# Altium PCB morse_code_watch.PcbDoc
Units mm, origin at the board's own origin, x right, y up, seen from the top; angles counter-clockwise.
Board outline 43.8 x 43.8 mm, 2 copper layers (Top Layer, Bottom Layer), stack 1.671 mm thick; 14 components, 12 nets, 58 pads, 3 vias.
Unrouted connection lines stored in the file: 1.
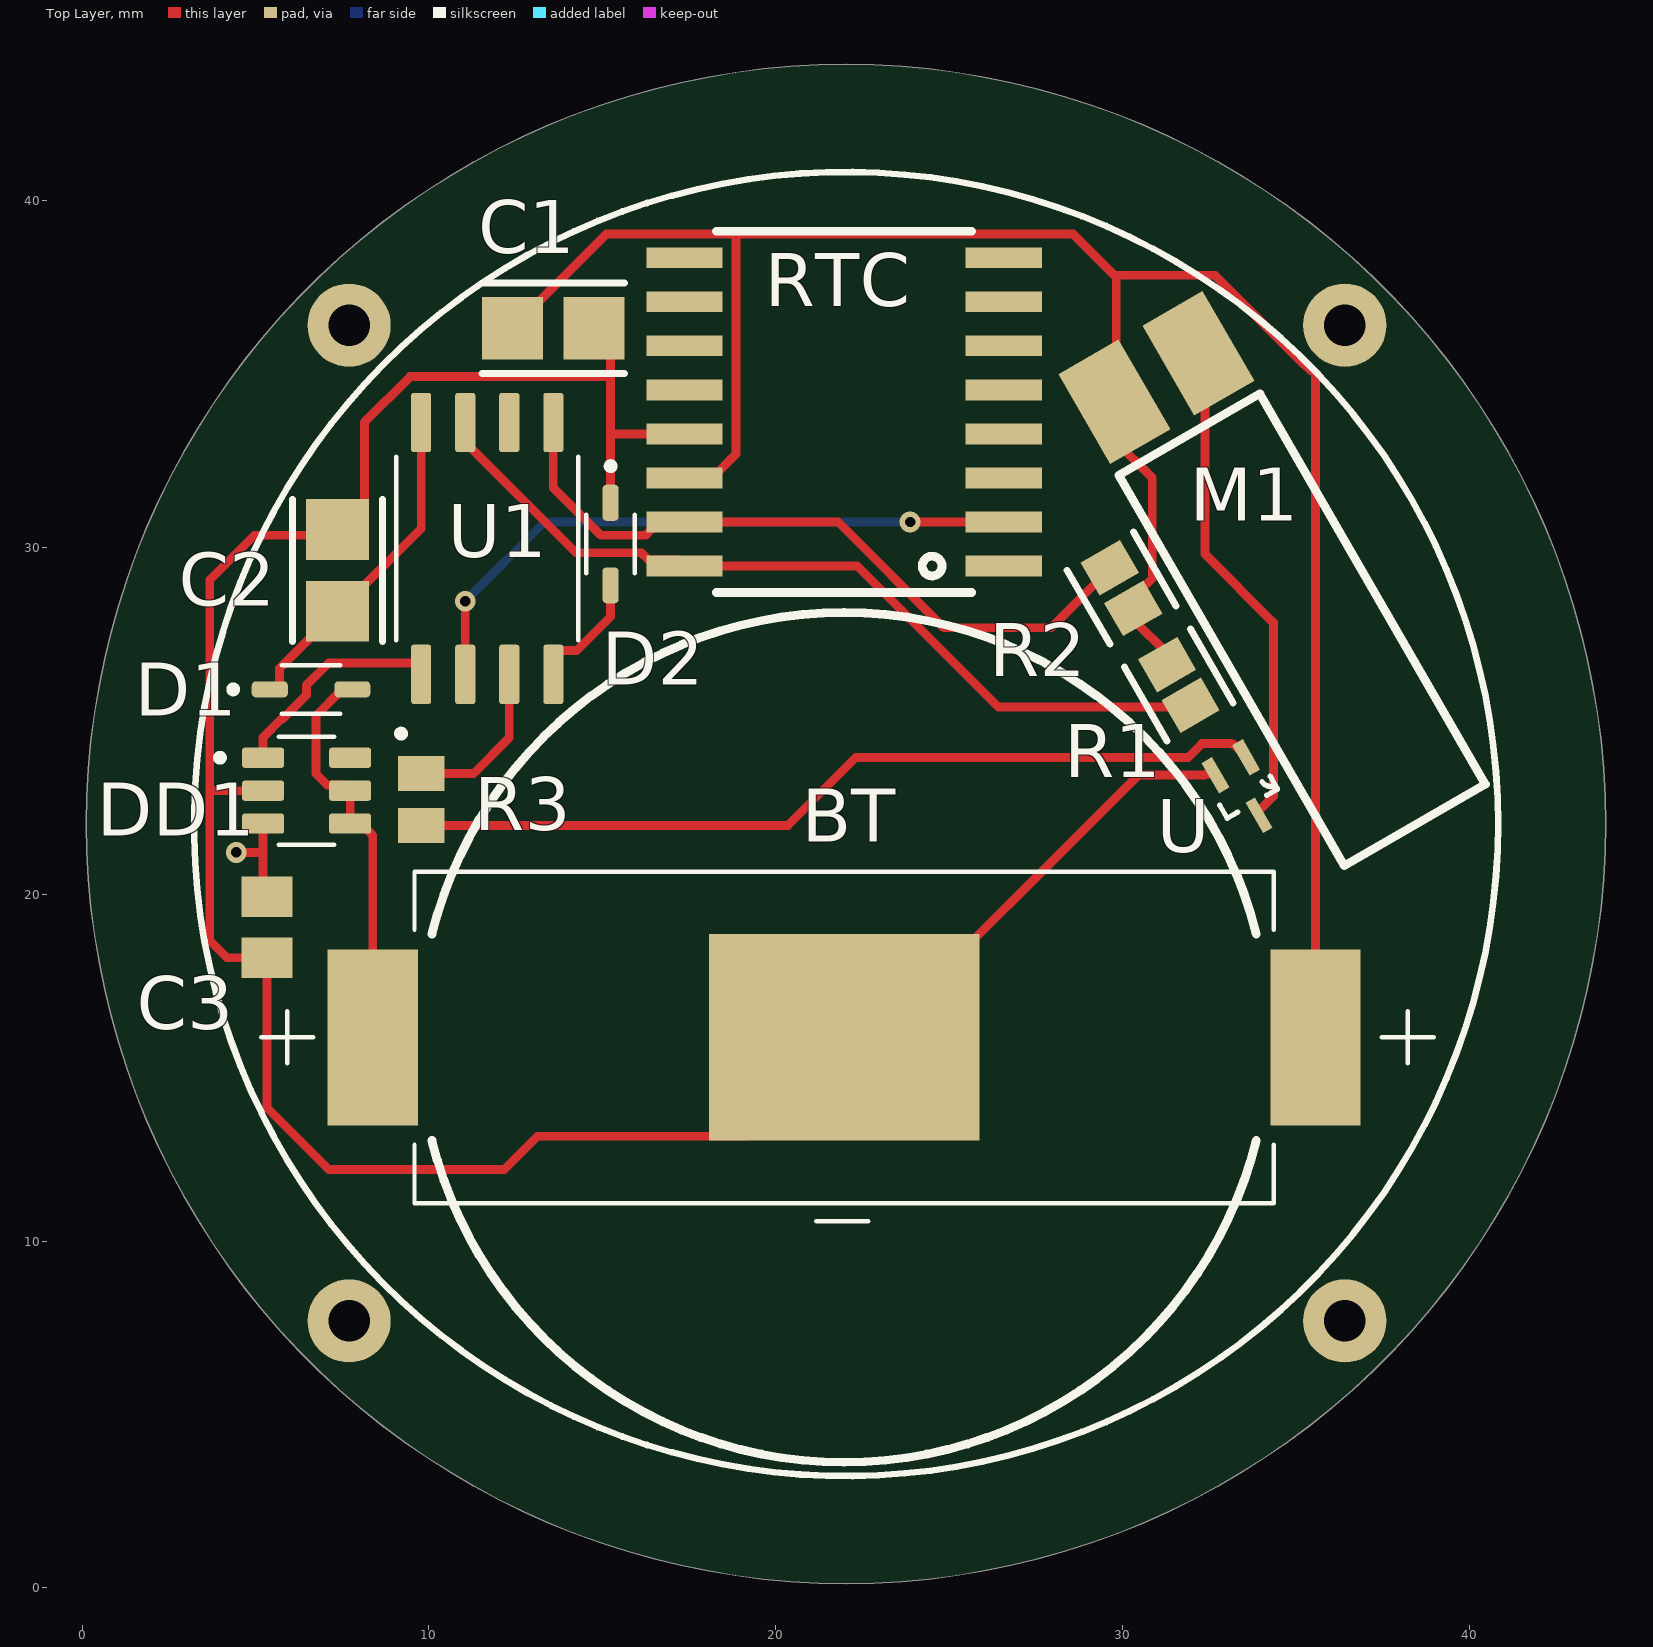
[diagram p0: Top Layer view]
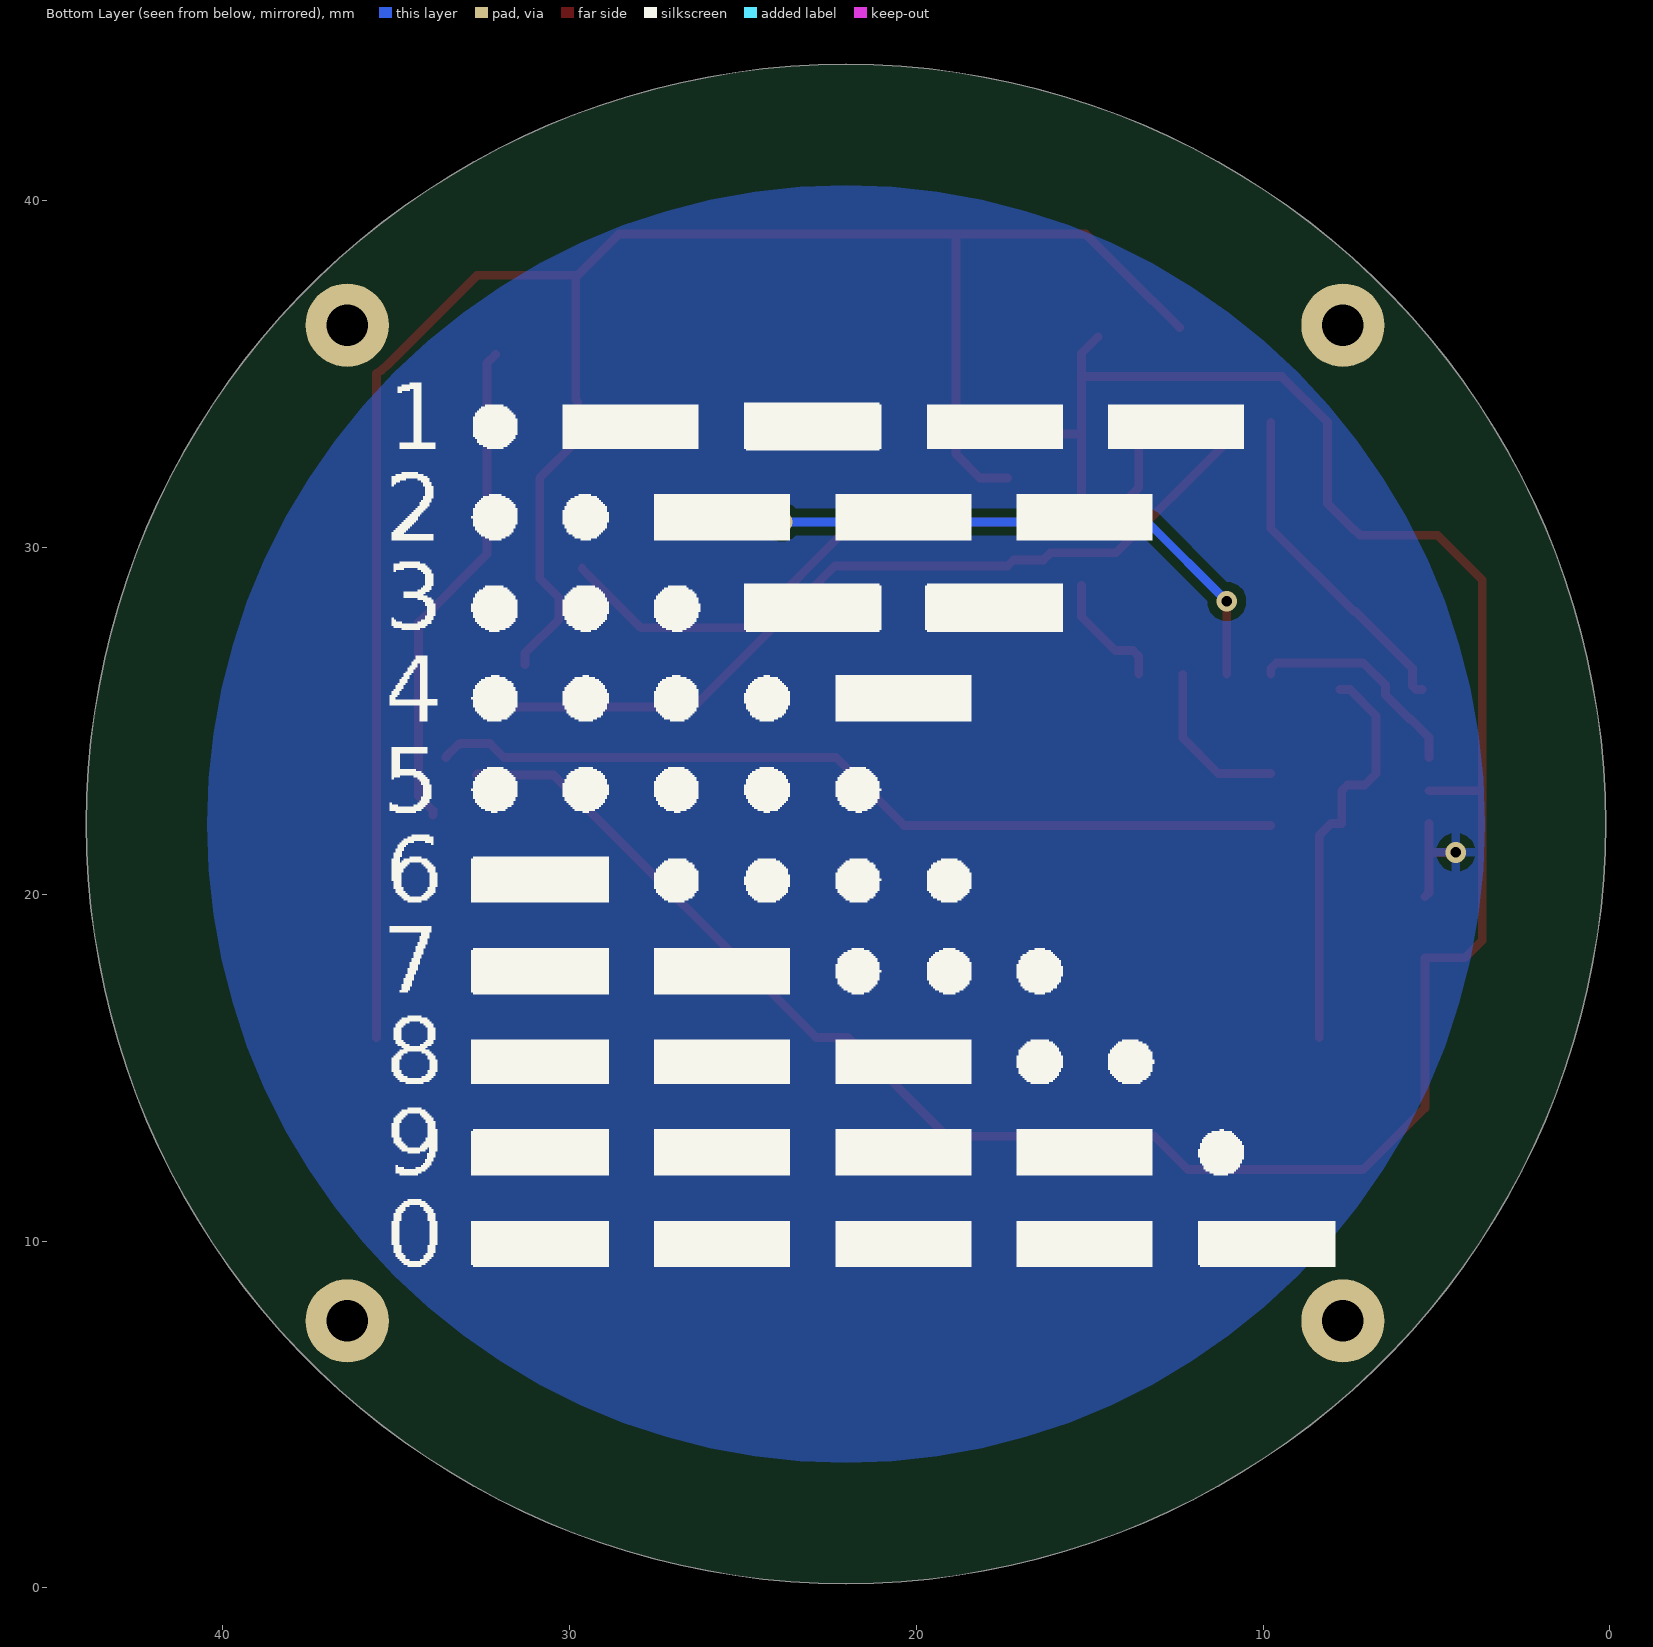
[diagram p1: Bottom Layer view, seen from below]
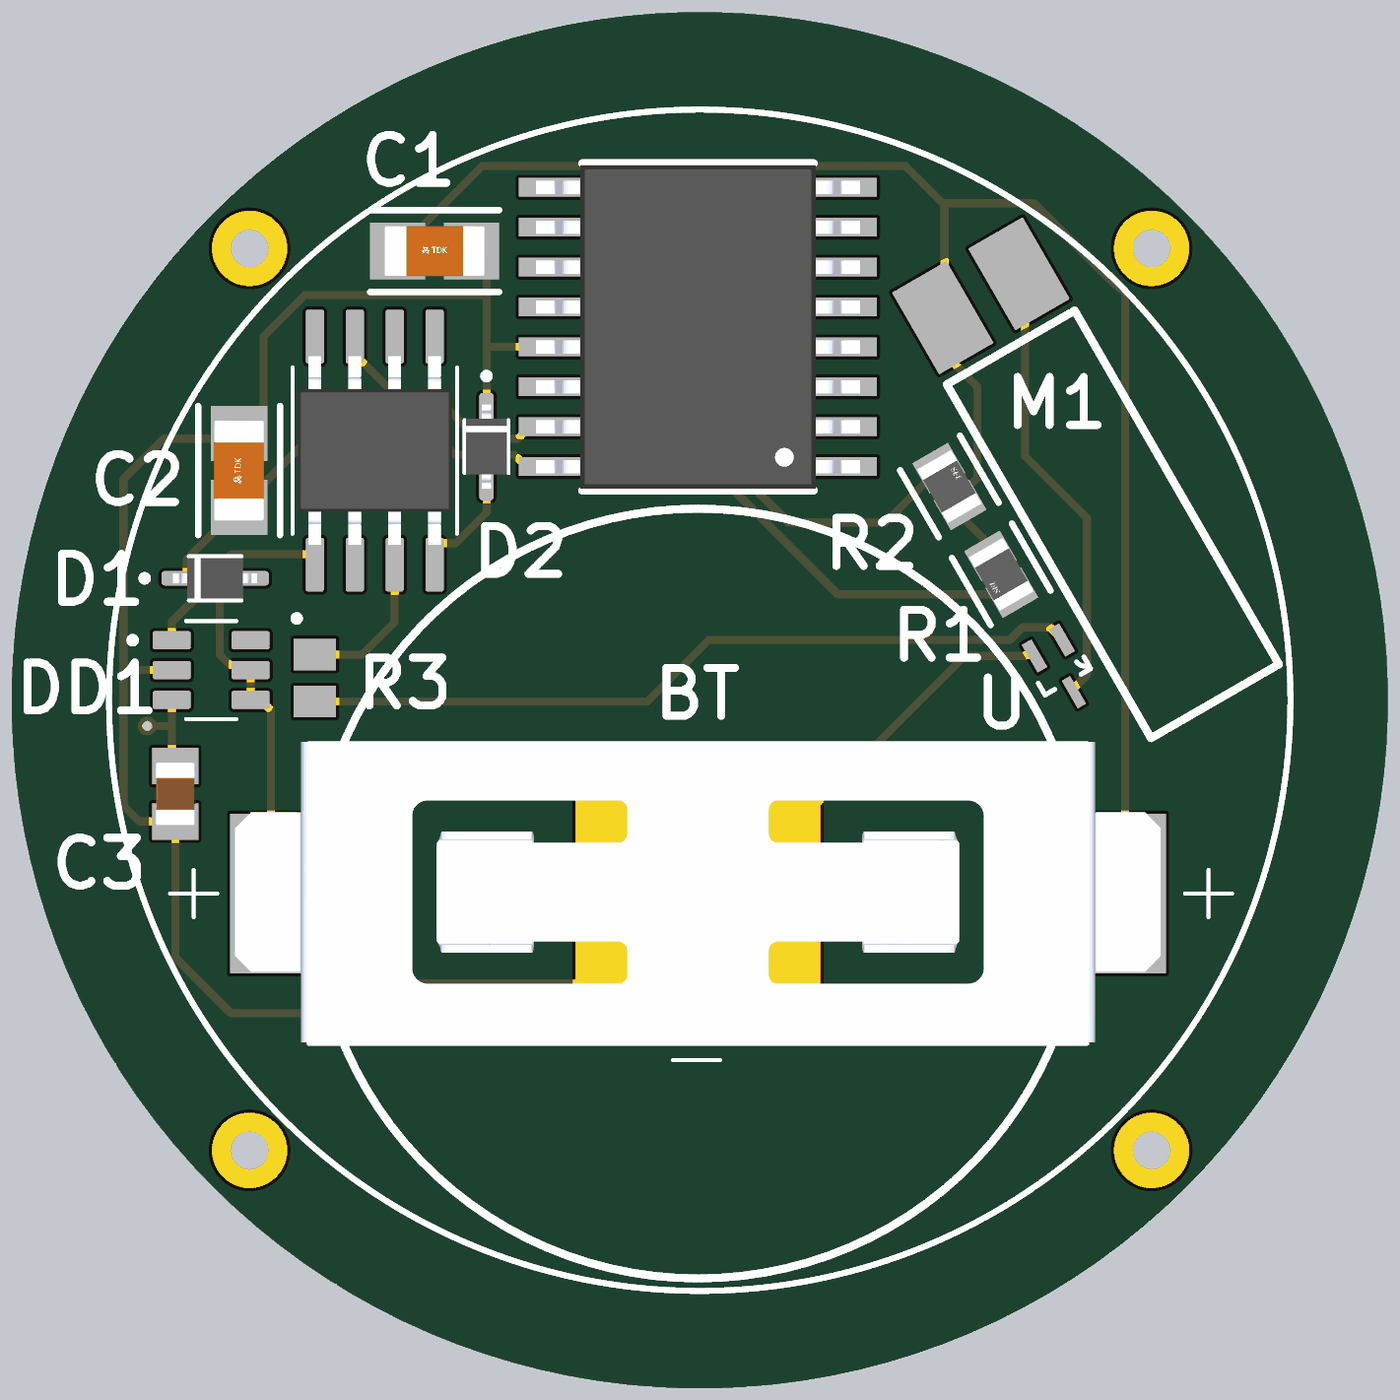
[diagram p2: 3D render of the assembled board from above, using the file's embedded part models]

## Layer stack, top to bottom
Top Solder: solder mask 0.0102, Solder Resist, Dk 3.5
Top Layer: signal copper 0.0356
Dielectric 1: dielectric 1.6, FR-4, Dk 4.8
Bottom Layer: signal copper 0.0356
Bottom Solder: solder mask 0.0102, Solder Resist, Dk 3.5

## Board outline
22.027,0.127 cw(c22.027,22.027) 0.127,22.027 cw(c22.027,22.027) 22.027,43.927 cw(c22.027,22.027) 43.927,22.027 cw(c22.027,22.027)

## Design rules (kind name [scope] priority, off if disabled: settings)
Clearance [All] p1: gap=0.15 ignorepadtopadclearanceinfootprint=FALSE
MinimumSolderMaskSliver [All] p1: minsoldermaskwidth=0.15
PolygonConnect [All] p1: connectstyle=Relief reliefconductorwidth=0.254 reliefentries=4 polygonreliefangle="90 Angle" airgapwidth=0.254
RoutingVias [All] p1: holewidth=0.3 width=0.6 viastyle="Through Hole" minholewidth=0.3 minwidth=0.6 maxholewidth=0.711 maxwidth=1.27
SilkToSolderMaskClearance [IsPad] p1: minsilkscreentomaskgap=0.15 clearancetoexposedcopper=TRUE
SolderMaskExpansion [All] p1: expansion=0.102 istentingtop=FALSE
Width [All] p1: maxlimit=0.254 minlimit=0.254 preferedwidth=0.254
28 further rules are at their usual default settings.

## Components (designator, comment, footprint, x,y, rotation, side; value= is the part's Value field where it differs from the comment)
BT "BC-2005" BAT_BC-2005 21.971,15.875 r180 top
C1 "C3216C0G1H104J160AA" FP-C3216-160-0_2-IPC_B 13.589,36.322 r0 top
C2 "C3216C0G1H104J160AA" FP-C3216-160-0_2-IPC_B 7.366,29.337 r90 top
C3 "08051A500GAT2A" CAPC2012X94N 5.334,19.05 r90 top
D1 "PMEG1020EA" PMEG1020EA 6.604,25.908 r180 top
D2 "PMEG1020EA" PMEG1020EA 15.24,30.099 r90 top
DD1 "TTP223-BA6" SOT23-6 6.477,22.987 r0 top
M1 "VZ4TL2B0620044P" VZ4TL2B0620044P 30.975,34.9 r30 top
R1 "RNCP0805FTD10K0" FP-RNCP0805-IPC_C 31.623,26.035 r120 top
R2 "RNCP0805FTD10K0" FP-RNCP0805-IPC_C 29.972,28.829 r300 top
R3 "ERA6AEB122V" RESC2013X60X40LL20T25 9.779,22.733 r270 top
RTC "" SO16W 21.971,33.909 r90 top
U "BC847BT-7-F" SOT50P160X90-3N 33.528,22.987 r300 top
U1 "ATTINY85-20SU" SOIC127P798X216-8N 11.684,29.972 r90 top

## Footprints (in the part's own frame and the unit in brackets; to place one, negate y for a bottom-side part, rotate by r counter-clockwise, add the part's x,y. Pads: shape width x height; smd on the part's side, far side on the other; paste and mask are expansions set on the pad)
BAT_BC-2005 [mm]
  rect 7.8x5.96 smd paste-5: NEG(0,0)
  rect 2.6x5.08 smd: S1+(-13.59,0) S2+(13.59,0)
  silkscreen extent -17,-12.25 16.8,12.25, body extent -14.73,-4.83 14.73,4.73, height 5.84
CAPC2012X94N [mm]
  rect 1.16x1.47 smd: 1(-0.88,0) 2(0.88,0)
  body extent -1,-0.63 1,0.63, height 0.94
FP-C3216-160-0_2-IPC_B [mm]
  rect 1.754x1.806 smd paste+0 mask+0: 1(-1.176,0) 2(1.176,0)
  silkscreen extent -2.05,-1.3 2.05,1.3, body extent -2.3,-1.15 2.3,1.15, height 0.25
FP-RNCP0805-IPC_C [mm]
  rect 1.105x1.308 smd paste+0 mask+0: 1(-0.676,0) 2(0.676,0)
  silkscreen extent -1.23,-1.1 1.23,1.1, body extent -1.33,-0.8 1.33,0.8, height 0.25
PMEG1020EA [mm]
  rrect50% 1.04x0.46 smd: 1(1.19,0) 2(-1.19,0)
  silkscreen extent -0.84,-0.7 2.34,0.7, body extent -1.34,-0.65 1.34,0.65, height 1.15
RESC2013X60X40LL20T25 [mm] "Chip Resistor, 2-Leads, Body 2.00x1.25mm, IPC High Density"
  rect 1x1.35 smd: 1(-0.75,0) 2(0.75,0)
  body extent -1.1,-0.72 1.1,0.72, height 0.6
SO16W [mm]
  rect 0.6x2.2 smd: 1(-4.445,-4.6) 2(-3.175,-4.6) 3(-1.905,-4.6) 4(-0.635,-4.6) 5(0.635,-4.6) 6(1.905,-4.6) 7(3.175,-4.6) 8(4.445,-4.6) 9(4.445,4.6) 10(3.175,4.6) 11(1.905,4.6) 12(0.635,4.6) 13(-0.635,4.6) 14(-1.905,4.6) 15(-3.175,4.6) 16(-4.445,4.6)
  silkscreen extent -5.21,-3.68 5.21,3.68, body extent -5.15,-5.16 5.15,5.16, height 2.65
SOIC127P798X216-8N [mm]
  rrect25% 1.71x0.58 smd: 1(-3.63,1.905) 2(-3.63,0.635) 3(-3.63,-0.635) 4(-3.63,-1.905) 5(3.63,-1.905) 6(3.63,-0.635) 7(3.63,0.635) 8(3.63,1.905)
  silkscreen extent -5.44,-2.62 2.65,2.62, body extent -3,-2.45 3,2.45, height 1.75
SOT23-6 [mm]
  rrect25% 1.21x0.58 smd: 1(-1.255,0.95) 2(-1.255,0) 3(-1.255,-0.95) 4(1.255,-0.95) 5(1.255,0) 6(1.255,0.95)
  silkscreen extent -2.6,-1.56 0.8,1.56
SOT50P160X90-3N [mil]
  rect 40x14 smd: 1(-32,20) 2(-32,-20)
  rect 40x12 smd: 3(32,0)
  silkscreen extent 0,-33 17,33
VZ4TL2B0620044P [mm]
  rect 2x3 smd: 1(-1.4,0) 2(1.4,0)
  silkscreen extent -2.35,-14.9 2.35,-1.9

## Part data
BT: "Battery Retainer Coin, 24.0mm 1 Cell SMD _SMT_ Tab", Package=None, Availability=Unavailable, MF="MPD _Memory Protection Devices_", MP=BC-2005-TR, Price=None, SnapEDA_Link=https://www.snapeda.com/parts/BC-2005-TR/MPD%20%28Memory%20Protection%20Devices%29/view-part/4449017/?ref=snap
C1 C2: library part CMP-08246-006180-1, "Multilayer Ceramic Capacitors 100nF ±5% 50V C0G SMD 1206", Capacitance=100nF, Case Code (Imperial)=1206, Case Code (Metric)=3216, Dielectric=C0G, Dielectric Material=Ceramic, Max Operating Temperature=125°C, Min Operating Temperature=-55°C, Package Quantity=1, Tolerance=5%, Voltage Rating=50V, Case/Package=1206, Construction=Flat, Depth=1.6mm, Height=1.6mm, Lead Free="Lead Free", Length=3.2mm, Mount="Surface Mount", Number of Pins=2, Packaging="Tape and Reel", Radiation Hardening=No, REACH SVHC="No SVHC", RoHS Compliant=Yes, Series=C, Termination=SMD/SMT, Thickness=0.075inch, Voltage Rating (DC)=50V, Weight=0.000571oz, Width=1.6mm
C3: "Cap Ceramic 50pF 100V C0G 2% SMD 0805 125Â°C T/R", Package=None, Availability=Unavailable, MP=08051A500GAT2A, Price=None
DD1: "1 KEY TOUCH PAD DETECTOR IC"
R1 R2: library part CMP-26527-007436-1, "10kΩ ±1% 0.25W 0805 High Power Anti-Sulfur Thin Film Chip Resistor", Case Code (Imperial)=0805, Case Code (Metric)=2012, Max Operating Temperature=155°C, Max Power Dissipation=250mW, Min Operating Temperature=-55°C, Resistance=10kR, Resistor Type="Thin Film", Temperature Coefficient=100ppm/°C, Tolerance=1%, Case/Package=0805, Features="Moisture Resistant", Height=0.024inch, Lead Free="Lead Free", Length=0.079inch, Mount="Surface Mount", Number of Terminations=2, Packaging="Tape and Reel", RoHS Compliant=Yes, Series=RNCP, Width=0.049inch
R3: library part CMP-2001-00589-1, Manufacturer=Panasonic, Part Number=ERA6AEB122V
RTC: library part DS3231, Package="SOIC-16 Maxim Integrated", Availability=Unavailable, MF="Maxim Integrated", MP=DS3231, Price=None, SnapEDA_Link=https://www.snapeda.com/parts/DS3231/Maxim%20Integrated/view-part/553791/?ref=snap
U: "Bipolar _BJT_ Transistor NPN 45V 100mA 100MHz 150mW Surface Mount SOT-523", Package="SOT-523 Diodes Inc.", Availability=Unavailable, MF="Diodes Inc.", MP=BC847BT-7-F, Price=None, SnapEDA_Link=https://www.snapeda.com/parts/BC847BT-7-F/Diodes%20Inc./view-part/316810/?ref=snap
U1: "AVR AVRÂ® ATtiny, IC de microcontrolador de seguridad funcional (FuSa) de 8 bits, 20 MHz, 8 KB (4K x 16), FLASH 8-SOIC", Package="SOIC-8 Microchip", Availability="In Stock", Check_prices=https://www.snapeda.com/parts/ATTINY85-20SU/Microchip/view-part/681099/?ref=eda, MF=Microchip, MP=ATTINY85-20SU, Price=None, SnapEDA_Link=https://www.snapeda.com/parts/ATTINY85-20SU/Microchip/view-part/681099/?ref=snap

## Free pads (board coordinates)
  round 2.4 hole 1.2: 1(7.7,7.7) 1(7.7,36.408) 1(36.408,7.7) 1(36.408,36.408)

## Via types
v1: diameter 0.6, hole 0.3, Top Layer to Bottom Layer, tented both sides, 3 vias

## Nets (pads, with @x,y where several pads share a name; then routed paths per layer and width w, separated by ;. In a path a pad name is that pad's centre, name@x,y a point inside that pad or via, vN(x,y) a via of type N, cw(c..) or ccw(c..) an arc to the next point about the centre after c; other vN are vias at no path point)
Base: R3.2 U.1 | length 24.9
  Top Layer w0.254: R3.2 20.351,21.983 22.313,23.945 31.892,23.945 32.294,24.347 33.132,24.347 33.145,24.334 33.19,24.334 33.562,23.962 U.1
Collector: M1.2 U.3 | length 14.4
  Top Layer w0.254: M1.2@32.131,35.56 32.381,35.31 32.381,29.803 34.351,27.834 34.351,22.829 33.934,22.413 U.3
GND: BT.NEG C1.2 C2.2 C3.1 D2.1 DD1.2 RTC.13 U.2 | length 73.4
  Top Layer w0.254: DD1.2 3.683,22.987 ; C1.2@14.765,36.068 15.24,35.593 15.24,34.925 ; D2.1 15.24,33.274 ; RTC.13 15.24,33.274 ; U.2 32.65,23.469 32.401,23.469 32.369,23.437 30.453,23.437 22.891,15.875 BT.NEG 19.118,13.022 13.133,13.022 12.176,12.065 7.112,12.065 5.334,13.843 C3.1 4.182,18.17 3.683,18.669 3.683,22.987 ; 3.683,22.987 3.683,29.061 4.975,30.353 7.206,30.353 C2.2 7.392,30.513 8.142,31.263 8.142,33.606 9.461,34.925 15.24,34.925 ; 15.24,33.274 15.24,34.925
"GND Diode": D2.2 U1.4 | length 3.5
  Top Layer w0.254: U1.4 13.589,26.865 13.752,27.028 14.26,27.028 15.24,28.008 D2.2
MOTOR: R3.1 U1.3 | length 4.8
  Top Layer w0.254: R3.1 11.291,23.483 12.319,24.511 U1.3
RESET: DD1.1 U1.1 | length 6.4
  Top Layer w0.254: DD1.1 5.222,24.526 5.753,25.057 5.784,25.057 6.468,25.741 6.468,26.026 7.112,26.67 9.616,26.67 9.779,26.507 U1.1
"RTC VCC": RTC.2 U1.2 | length 18.6
  Top Layer w0.254: U1.2 v1(11.049,28.448) ; v1(23.876,30.734) RTC.2
  Bottom Layer w0.254: v1(11.049,28.448) 13.335,30.734 v1(23.876,30.734)
SCL: R1.1 RTC.16 U1.7 | length 24.7
  Top Layer w0.254: U1.7 11.049,33.037 14.241,29.845 16.129,29.845 16.337,29.637 17.198,29.637 RTC.16 22.352,29.464 26.417,25.399 31.911,25.399 R1.1
SDA: R2.1 RTC.15 U1.5 | length 20.7
  Top Layer w0.254: U1.5 13.589,31.719 14.955,30.353 16.249,30.353 16.398,30.502 16.398,30.561 16.571,30.734 21.8,30.734 24.848,27.686 27.94,27.686 29.634,29.38 R2.1
Touch: C3.2 DD1.3 | length 2.9
  Top Layer w0.254: v1(4.445,21.209) 5.222,21.209 ; DD1.3 5.222,21.209 ; C3.2 5.222,20.042 5.222,21.209
VCC: BT.S1+ BT.S2+ C1.1 D1.2 DD1.4 DD1.5 M1.1 R1.2 R2.2 RTC.14 | length 77.3
  Top Layer w0.254: D1.2 7.504,25.908 6.746,25.15 6.746,23.48 7.076,23.15 7.569,23.15 DD1.5 DD1.4 8.047,22.037 8.381,21.703 BT.S2+ ; C1.1@12.413,36.332 12.413,36.348 13.163,37.098 13.179,37.098 15.115,39.035 18.852,39.035 ; RTC.14 18.171,32.004 18.852,32.685 18.852,39.035 ; 29.819,37.846 29.819,34.257 M1.1 29.763,33.1 30.858,32.005 30.858,29.105 30.31,28.558 R2.2 30.31,27.919 31.285,26.945 R1.2 ; BT.S1+ 35.561,35.014 cw(c36.408,36.408) 35.255,35.255 32.663,37.846 29.763,37.846 28.574,39.035 18.852,39.035
"VCC Diode": C2.1 D1.1 U1.8 | length 9.6
  Top Layer w0.254: D1.1 5.595,25.908 5.698,26.011 5.698,26.519 7.34,28.161 C2.1 7.392,28.161 9.779,30.548 U1.8
pads on no net: DD1.6 RTC.1 RTC.3 RTC.4 RTC.5 RTC.6 RTC.7 RTC.8 RTC.9 RTC.10 RTC.11 RTC.12 U1.6

## Polygon pours and split planes (outlines as drawn)
Touch on Bottom Layer "TOUCH_L02_P000" (solid, pour order 0): 22.027,3.227 cw(c22.027,22.027) 3.227,22.027 cw(c22.027,22.027) 22.027,40.827 cw(c22.027,22.027) 40.827,22.027 cw(c22.027,22.027)

## Silkscreen, mask and mechanical layers (free items; w line width, h text height)
Top Overlay:
  circle w0.19: c22.027,22.027 r18.8
Bottom Overlay:
  drawing of 60 lines, arcs and shapes, not listed